# EAGLE board USB 2.0 A receptacle mid-point (EAGLE 6.3)
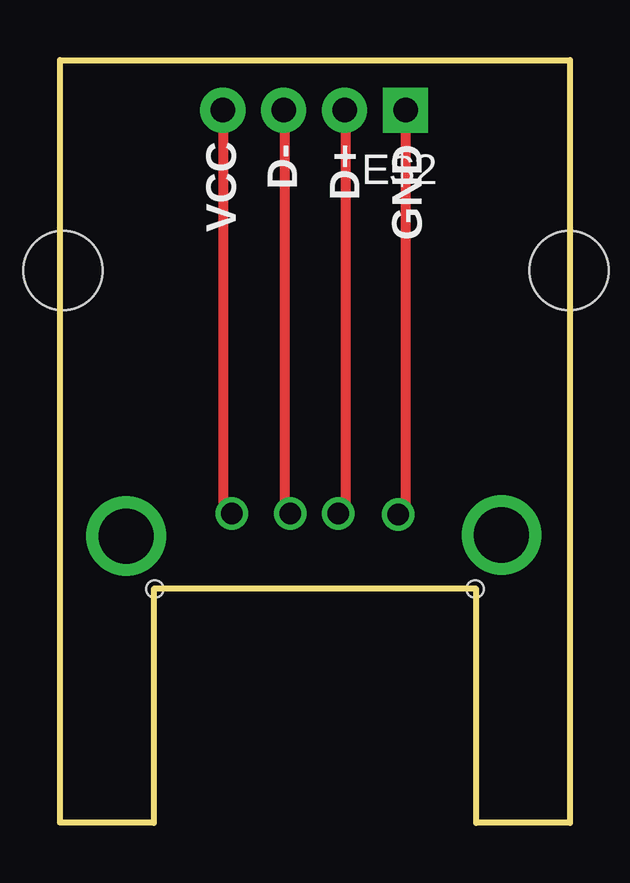
[diagram p0: board, top side]
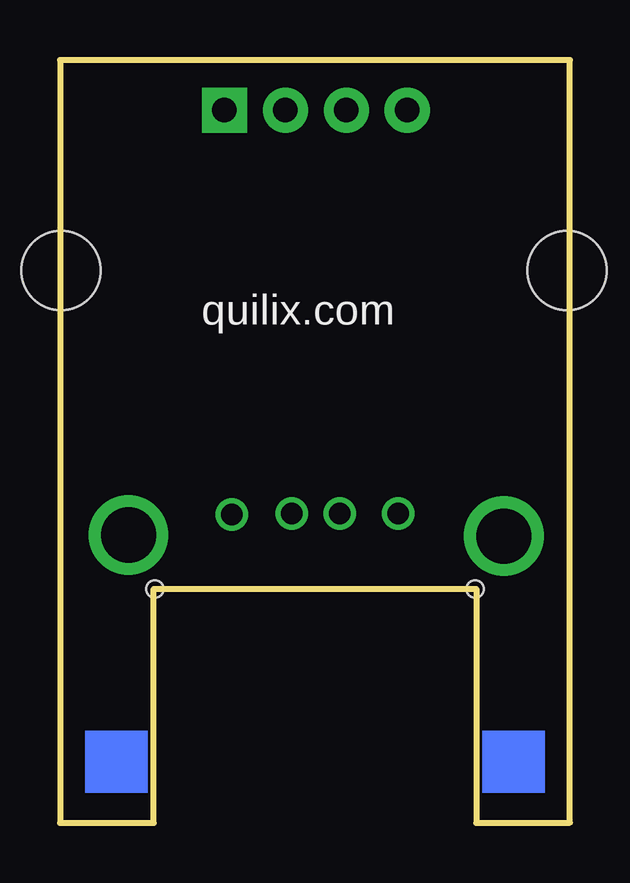
[diagram p1: board, bottom side, seen from below]

Size 21.27 x 31.79 mm. Coordinates in mm from the lower left corner, seen from the top.
Outline: 0,0.01 0,31.79 21.27,31.79 21.27,0 17.36,0 17.36,9.75 3.91,9.75 3.91,0 0,0.01
Copper layers (1*16): Top 0.035mm / dielectric 1.5mm / Bottom 0.035mm
Design rules "default": minimum track width 10mil, minimum drill 24mil, track to track 8mil, track to pad 8mil, pad to pad 8mil, via to via 8mil, smd to smd 8mil, copper to edge 40mil, drill to drill 8mil, minimum pad ring 10mil, minimum via ring 8mil, stop-mask expansion 4mil, vias tented up to drill 0mil, thermal gap 10mil
Holes 0.7 mm at 3.96,9.75 17.31,9.75
bKeepout: area 0.9,1.1 to 3.8,4; area 17.5,1.1 to 20.3,4

## Footprints (pad centres in the part's own frame; a part is rotated, then mirrored left to right if it is on the bottom)
1X04_NO_SILK = drill 1.016 pad 1.88 square: 1 0,0 | drill 1.016 pad 1.88: 2 2.54,0; 3 5.08,0; 4 7.62,0
STAND-OFF = hole 3.302: 0,0

## Placement (x,y rotation side)
E$2  [1X04_NO_SILK]  14.41,29.7 180 top
JP3  STAND-OFF  [STAND-OFF]  21.23,23.02 0 top
JP4  STAND-OFF  [STAND-OFF]  0.13,23.02 0 top

## Library data of the parts
E$2 JP3 JP4 = SparkFun

## Tracks (layer width: path | path; a pad name or v marks a point on that pad's centre or on a via)
S$1  (via drill 2.3)
  other vias: 2.76,11.95
S$2  (via drill 2.3)
  other vias: 18.41,12
S$3  (via drill 0.9)
  other vias: 11.61,12.9
S$4  (via drill 0.9)
  other vias: 14.11,12.85
S$5  (via drill 0.9)
  other vias: 9.61,12.9
S$6  (via drill 0.9)
  Top 0.406: 6.81,29.7 6.81,13.25 v7.16,12.9
S$7
  Top 0.406: 9.36,29.45 9.36,13.1 9.56,12.9
S$8
  Top 0.406: 11.91,29.45 11.91,13.15 11.66,12.9
S$9
  Top 0.406: 14.41,29.55 14.41,13.15 14.11,12.85
(copper drawn outside any net)
  shapes: Bottom area x2

## Text on the board
_tsilk: VCC | D- | D+ | GND
_bsilk: quilix.com